# Altium PCB controller.PcbDoc
Units mm, origin at the board's own origin, x right, y up, seen from the top; angles counter-clockwise.
Board outline 152.4 x 101.6 mm, 2 copper layers (Top Layer, Bottom Layer); 67 components, 110 nets, 264 pads, 12 vias.
Unrouted connection lines stored in the file: 118.
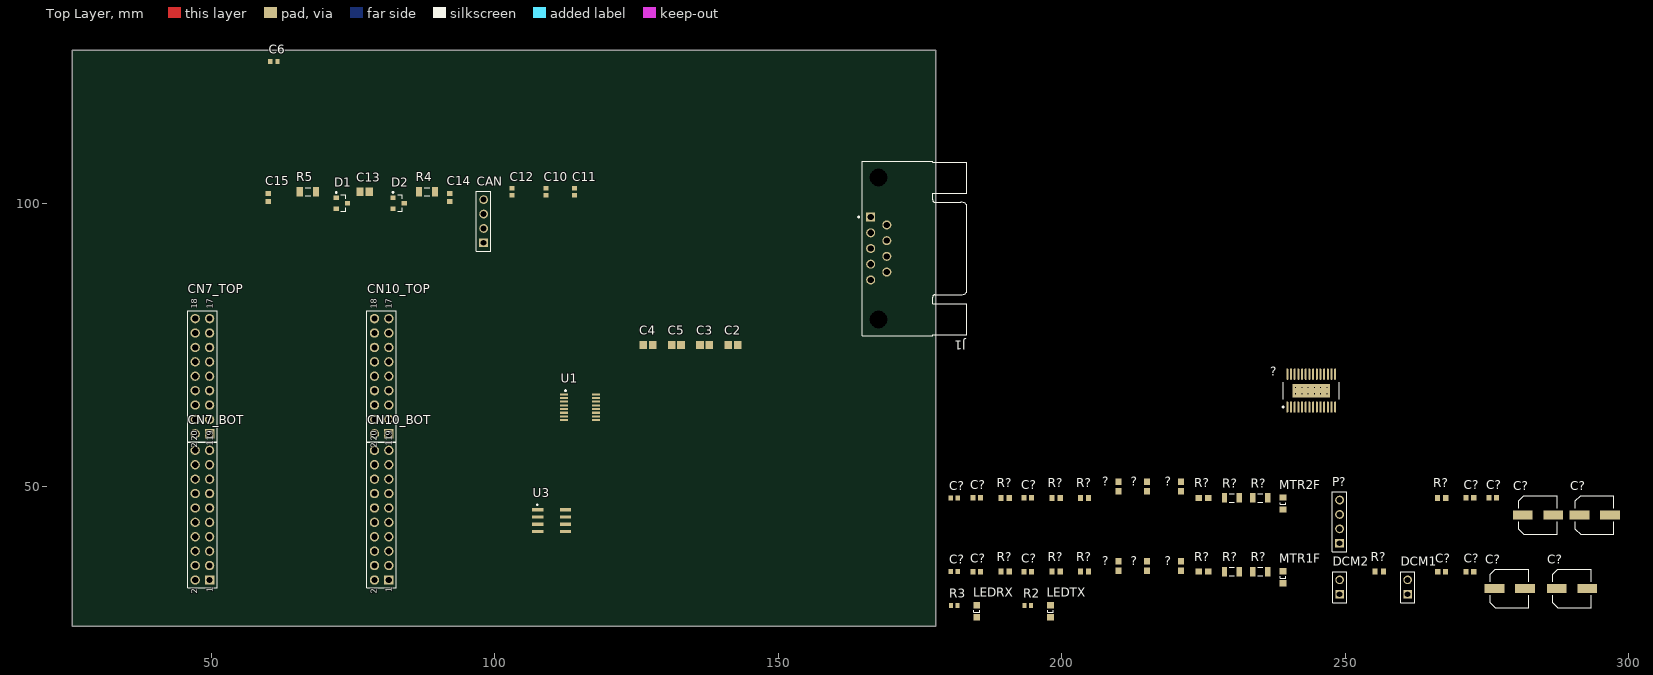
[diagram p0: Top Layer view]
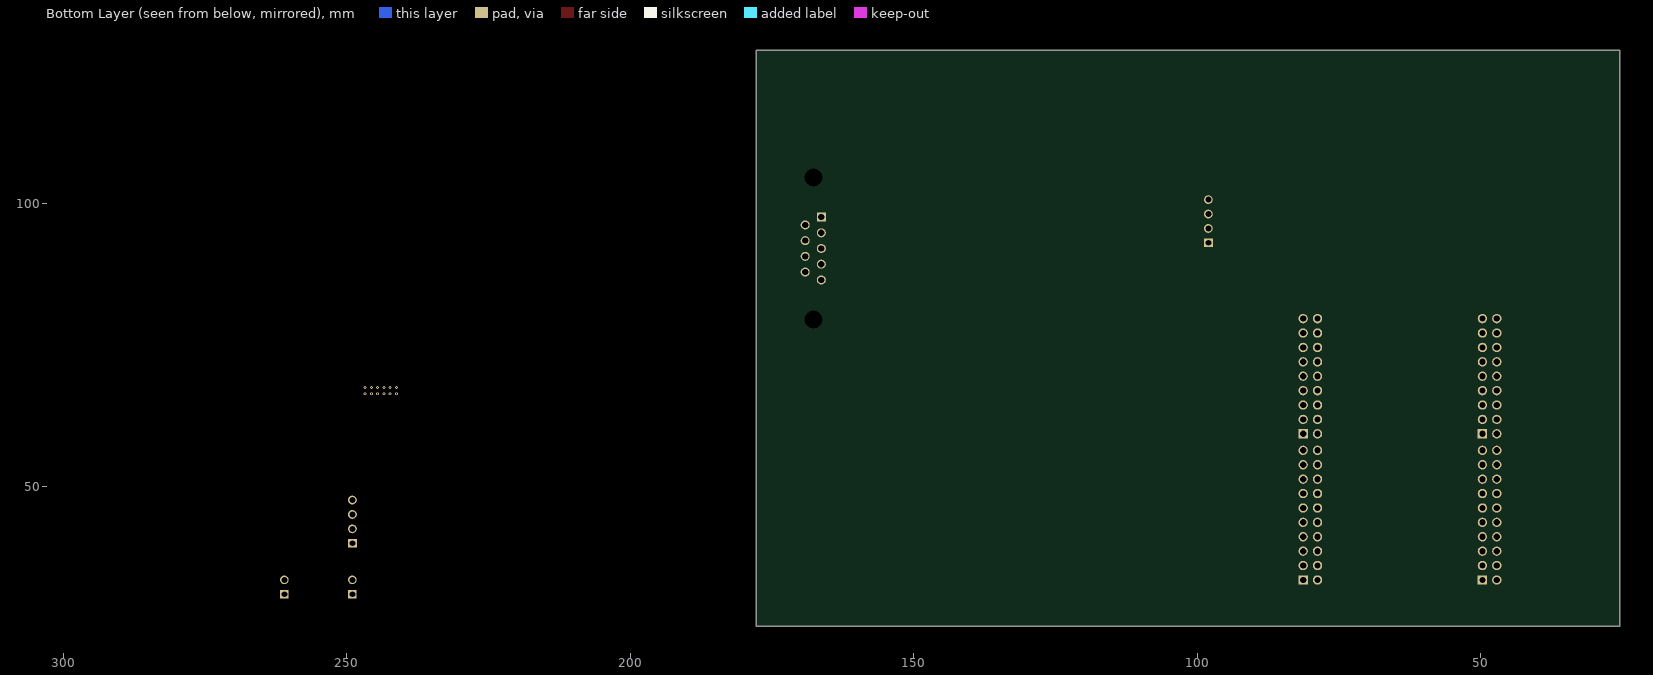
[diagram p1: Bottom Layer view, seen from below]

## Layer stack, top to bottom
Top Solder: solder mask 0.0102, Solder Resist, Dk 3.5
Top Layer: signal copper 0.0356
Dielectric 1: dielectric 0.32, FR-4, Dk 4.8
Bottom Layer: signal copper 0.0356
Bottom Solder: solder mask 0.0102, Solder Resist, Dk 3.5

## Board outline
25.4,25.4 177.8,25.4 177.8,127 25.4,127

## Design rules (kind name [scope] priority, off if disabled: settings)
Clearance [All] p1: gap=0.254 ignorepadtopadclearanceinfootprint=FALSE except(0: Arc-Hole Track-Hole SMDPad-Hole THPad-Hole Via-Hole Fill-Hole Poly-Hole Region-Hole Text-Hole)
PolygonConnect [All] p1: connectstyle=Relief reliefconductorwidth=0.254 reliefentries=4 polygonreliefangle="90 Angle" airgapwidth=0.254
RoutingVias [All] p1: holewidth=0.711 width=1.27 viastyle="Through Hole" minholewidth=0.711 minwidth=1.27 maxholewidth=0.711 maxwidth=1.27
SolderMaskExpansion [All] p1: expansion=0.102
Width [All] p1: maxlimit=0.254 minlimit=0.254 preferedwidth=0.254
30 further rules are at their usual default settings.

## Classes and differential pairs
component class "Stepper Motor Driver": ? C? MTR2F P? R?
component class "DC Motor Driver": ? C? DCM1 DCM2 MTR1F R?
component class CANbus: C10 C11 C12 C13 C14 C15 CAN D1 D2 R4 R5 U3
component class rs232: C2 C3 C4 C5 C6 J1 LEDRX LEDTX R2 R3 U1
component class microcontroller: CN7_BOT CN7_TOP CN10_BOT CN10_TOP

## Components (designator, comment, footprint, x,y, rotation, side; value= is the part's Value field where it differs from the comment)
? "0R" RESC1609X55X30ML10T20 210,36 r90 top
? "0R" RESC1609X55X30ML10T20 215,36 r90 top
? "0R" RESC1609X55X30ML10T20 221,36 r90 top
? "DRV8843" TI-PWP28-5720X1950TP_M 244,66.929 r90 top
? "0R" RESC1609X55X30ML10T20 221,50 r90 top
? "0R" RESC1609X55X30ML10T20 210,50 r90 top
? "0R" RESC1609X55X30ML10T20 215,50 r90 top
C2 "100nF" CAPC2013X94X50NL20T25 142,75 r0 top
C3 "100nF" CAPC2013X94X50NL20T25 137,75 r0 top
C4 "100nF" CAPC2013X94X50NL20T25 127,75 r0 top
C5 "100nF" CAPC2013X94X50NL20T25 132,75 r0 top
C6 "100nF" CAPC1608X92X38LL15T08 61,125 r0 top
C10 "100nF" CAPC1608X92X38LL15T08 109,102 r90 top
C11 "100nF" CAPC1608X92X38LL15T08 114,102 r90 top
C12 "100nF" CAPC1608X92X38LL15T08 103,102 r90 top
C13 "47nF" CAPC2013X88X50NL20T25 77,102 r0 top
C14 "47pF" CAPC1608X87X35NL15T15 92,101 r90 top
C15 "47pF" CAPC1608X87X35NL15T15 60,101 r90 top
C? "100u" NIC-CAPA2-6.3X5.8_V 279,32 r0 top
C? "100u" NIC-CAPA2-6.3X5.8_V 290,32 r0 top
C? "100n" CAPC1608X87X35NL15T15 194,35 r0 top
C? "470n" CAPC1608X90X35NL10T15 185,35 r0 top
C? "100n" CAPC1608X87X35NL15T15 267,35 r0 top
C? "10n" CAPC1608X87X35LL15T15 181,35 r0 top
C? "100n" CAPC1608X87X35NL15T15 272,35 r0 top
C? "100n" CAPC1608X87X35NL15T15 272,48 r0 top
C? "470n" CAPC1608X90X35NL10T15 185,48 r0 top
C? "10n" CAPC1608X87X35LL15T15 181,48 r0 top
C? "100n" CAPC1608X87X35NL15T15 194,48 r0 top
C? "100u" NIC-CAPA2-6.3X5.8_V 284,45 r0 top
C? "100n" CAPC1608X87X35NL15T15 276,48 r0 top
C? "100u" NIC-CAPA2-6.3X5.8_V 294,45 r0 top
CAN "TSW-104-08-T-S" SMTC-TSW-104-08-X-S 98,93 r90 top
CN7_BOT "61302021121" 61302021121 48.387,44.958 r90 top
CN7_TOP "61301821121" 61301821121 48.387,69.469 r90 top
CN10_BOT "61302021121" 61302021121 80.01,44.958 r90 top
CN10_TOP "61301821121" 61301821121 80.01,69.469 r90 top
D1 "SM12T1G" ONSC-SOT-23-3-318-08_V 73,100 r0 top
D2 "SM12T1G" ONSC-SOT-23-3-318-08_V 83,100 r0 top
DCM1 "MTLW-102-05-T-S-172" SMTC-MTLW-102-05-X-S-172 261,31 r90 top
DCM2 "MTLW-102-05-T-S-172" SMTC-MTLW-102-05-X-S-172 249,31 r90 top
J1 "1734354-1" TE-1734354-1-9_V 174,92 r270 top
LEDRX "RED" 0805_A 185,28 r90 top
LEDTX "GREEN" 0805_A 198,28 r90 top
MTR1F "RED" 0805_A 239,34 r90 top
MTR2F "RED" 0805_A 239,47 r90 top
P? "TSW-104-08-L-S" SMTC-TSW-104-08-X-S 249,40 r90 top
R2 "1.2K" RESC1609X50X30LL10T20 194,29 r0 top
R3 "680R" RESC1609X50X30LL10T20 181,29 r0 top
R4 "60R" RESC3216X70X50NL05T20 88,102 r0 top
R5 "60R" RESC3216X70X50NL05T20 67,102 r0 top
R? "10K" RESC1608X55X30ML15T15 199,35 r0 top
R? "10K" RESC1608X55X30ML15T15 190,35 r0 top
R? "0R22 1W" RESC3116X70X45LL15T20 230,35 r0 top
R? "0R22 1W" RESC3116X70X45LL15T20 235,35 r0 top
R? "0R" RESC1609X55X30ML10T20 225,35 r0 top
R? "1K" RESC1608X55X30ML15T15 256,35 r0 top
R? "10K" RESC1608X55X30ML15T15 204,35 r0 top
R? "10K" RESC1608X55X30ML15T15 190,48 r0 top
R? "0R22 1W" RESC3116X70X45LL15T20 230,48 r0 top
R? "0R" RESC1609X55X30ML10T20 225,48 r0 top
R? "1K" RESC1608X55X30ML15T15 267,48 r0 top
R? "10K" RESC1608X55X30ML15T15 204,48 r0 top
R? "0R22 1W" RESC3116X70X45LL15T20 235,48 r0 top
R? "10K" RESC1608X55X30ML15T15 199,48 r0 top
U1 "ICL3232ECV-16Z" TSSOP16_4P40X5 115,64 r0 top
U3 "MCP2542WFD-H/SN" SOIC8_4P9X3P9MC 110,44 r0 top

## Footprints (in the part's own frame and the unit in brackets; to place one, negate y for a bottom-side part, rotate by r counter-clockwise, add the part's x,y. Pads: shape width x height; smd on the part's side, far side on the other; paste and mask are expansions set on the pad)
0805_A [mm] "Chip LED, 2-Leads, Body 2.0x1.3mm, IPC Medium Density"
  rect 1.1x1.2 smd: 1(-1.05,0) 2(1.05,0)
  silkscreen extent -0.15,-0.5 0.15,0.5, body extent -1,-0.62 1,0.63, height 0.68
61301821121 [mm] "Pin Header, pitch 2.54 mm, THT, Vertical, dual row, 18p"
  rect 1.65x1.65 hole 1.1: 1(-10.16,-1.27)
  round 1.65 hole 1.1: 2(-10.16,1.27) 3(-7.62,-1.27) 4(-7.62,1.27) 5(-5.08,-1.27) 6(-5.08,1.27) 7(-2.54,-1.27) 8(-2.54,1.27) 9(0,-1.27) 10(0,1.27) 11(2.54,-1.27) 12(2.54,1.27) 13(5.08,-1.27) 14(5.08,1.27) 15(7.62,-1.27) 16(7.62,1.27) 17(10.16,-1.27) 18(10.16,1.27)
  silkscreen extent -11.58,-2.62 11.58,2.62, body extent -11.43,-2.54 11.43,2.54, height 8.59
61302021121 [mm] "Pin Header, pitch 2.54 mm, THT, Vertical, dual row, 20p"
  rect 1.65x1.65 hole 1.1: 1(-11.43,-1.27)
  round 1.65 hole 1.1: 2(-11.43,1.27) 3(-8.89,-1.27) 4(-8.89,1.27) 5(-6.35,-1.27) 6(-6.35,1.27) 7(-3.81,-1.27) 8(-3.81,1.27) 9(-1.27,-1.27) 10(-1.27,1.27) 11(1.27,-1.27) 12(1.27,1.27) 13(3.81,-1.27) 14(3.81,1.27) 15(6.35,-1.27) 16(6.35,1.27) 17(8.89,-1.27) 18(8.89,1.27) 19(11.43,-1.27) 20(11.43,1.27)
  silkscreen extent -12.85,-2.62 12.85,2.62, body extent -12.7,-2.54 12.7,2.54, height 8.59
CAPC1608X87X35LL15T15 [mm] "Chip Capacitor, 2-Leads, Body 1.60x0.80mm, IPC High Density"
  rect 0.8x0.9 smd: 1(-0.625,0) 2(0.625,0)
  body extent -0.87,-0.48 0.87,0.48, height 0.87
CAPC1608X87X35NL15T15 [mm] "Chip Capacitor, 2-Leads, Body 1.60x0.80mm, IPC Medium Density"
  rect 0.9x1 smd: 1(-0.675,0) 2(0.675,0)
  body extent -0.87,-0.48 0.87,0.47, height 0.87
CAPC1608X90X35NL10T15 [mm] "Chip Capacitor, 2-Leads, Body 1.60x0.80mm, IPC Medium Density"
  rect 0.85x0.95 smd: 1(-0.675,0) 2(0.675,0)
  body extent -0.85,-0.45 0.85,0.45, height 0.9
CAPC1608X92X38LL15T08 [mm] "Chip Capacitor, 2-Leads, Body 1.60x0.80mm, IPC High Density"
  rect 0.75x0.9 smd: 1(-0.625,0) 2(0.625,0)
  body extent -0.87,-0.48 0.87,0.48, height 0.92
CAPC2013X88X50NL20T25 [mm] "Chip Capacitor, 2-Leads, Body 2.00x1.25mm, IPC Medium Density"
  rect 1.3x1.45 smd: 1(-0.8,0) 2(0.8,0)
  body extent -1.1,-0.72 1.1,0.72, height 0.88
CAPC2013X94X50NL20T25 [mm] "Chip Capacitor, 2-Leads, Body 2.01x1.25mm, IPC Medium Density"
  rect 1.35x1.45 smd: 1(-0.825,0) 2(0.825,0)
  body extent -1.1,-0.72 1.11,0.72, height 0.94
NIC-CAPA2-6.3X5.8_V [mm] "Aluminum Electrolytic Capacitor, Diameter 6.3mm, Height 6.1mm, Pitch 5.4mm"
  rect 3.5x1.6 smd: 1(-2.7,0) 2(2.7,0)
  silkscreen extent -3.4,-3.4 3.4,3.4, body extent -3.14,-3.12 3.14,3.15, height 6.1
ONSC-SOT-23-3-318-08_V [mm] "SOT23, 3-Leads, Body 2.92x1.3mm, Pitch 0.95mm"
  rect 0.9x0.8 smd: 1(-1,0.95) 2(-1,-0.95) 3(1,0)
  silkscreen extent -1.12,-1.46 0.65,2.02, body extent -0.65,-1.46 0.65,1.46, height 1.11
RESC1608X55X30ML15T15 [mm] "Chip Resistor, 2-Leads, Body 1.60x0.80mm, IPC Low Density"
  rect 0.9x1.05 smd: 1(-0.725,0) 2(0.725,0)
  body extent -0.87,-0.48 0.87,0.48, height 0.55
RESC1609X50X30LL10T20 [mm] "Chip Resistor, 2-Leads, Body 1.55x0.85mm, IPC High Density"
  rect 0.7x0.85 smd: 1(-0.575,0) 2(0.575,0)
  body extent -0.82,-0.48 0.82,0.48, height 0.5
RESC1609X55X30ML10T20 [mm] "Chip Resistor, 2-Leads, Body 1.60x0.85mm, IPC Low Density"
  rect 1.15x1.05 smd: 1(-0.825,0) 2(0.825,0)
  body extent -0.85,-0.48 0.85,0.48, height 0.55
RESC3116X70X45LL15T20 [mm] "Chip Resistor, 2-Leads, Body 3.10x1.60mm, IPC High Density"
  rect 0.95x1.65 smd: 1(-1.3,0) 2(1.3,0)
  silkscreen extent -0.45,-0.72 0.45,0.72, body extent -1.63,-0.87 1.63,0.87, height 0.7
RESC3216X70X50NL05T20 [mm] "Chip Resistor, 2-Leads, Body 3.20x1.60mm, IPC Medium Density"
  rect 1.1x1.65 smd: 1(-1.425,0) 2(1.425,0)
  silkscreen extent -0.5,-0.72 0.5,0.72, body extent -1.63,-0.82 1.62,0.82, height 0.7
SMTC-MTLW-102-05-X-S-172 [mm] "Terminal Assembly, 1x2 Pins, Vertical, 2.54mm Pitch, Male"
  rect 1.52x1.52 hole 1.02: 1(0,0)
  round 1.52 hole 1.02: 2(2.54,0)
  silkscreen extent -1.46,-1.24 4,1.24, body extent -1.27,-1.24 3.81,1.24, height 6.02
SMTC-TSW-104-08-X-S [mm] ".025 SQ Post Terminal Strip Assembly, 1x4 Pins, Vertical, 2.54mm Pitch, Male"
  rect 1.55x1.55 hole 1.02: 1(0,0)
  round 1.55 hole 1.02: 2(2.54,0) 3(5.08,0) 4(7.62,0)
  silkscreen extent -1.46,-1.27 9.08,1.27, body extent -1.27,-1.27 8.89,1.27, height 8.38
SOIC8_4P9X3P9MC [mil]
  rect 78x22 smd: 1(-97,75) 2(-97,25) 3(-97,-25) 4(-97,-75) 5(97,-75) 6(97,-25) 7(97,25) 8(97,75)
  silkscreen extent -105,105 -95,115, body extent -122,-96 122,96, height 69
TE-1734354-1-9_V [mm] "TH, 9-Leads, Body 30.8x18.4mm, Pitch 2.77mm"
  rect 1.6x1.6 hole 1.09: 1(-5.54,-7.72)
  round 1.6 hole 1.09: 2(-2.77,-7.72) 3(0,-7.72) 4(2.77,-7.72) 5(5.54,-7.72) 6(-4.155,-4.88) 7(-1.385,-4.88) 8(1.385,-4.88) 9(4.155,-4.88)
  round 0 hole 3.18 unplated: MH1(-12.52,-6.3) MH2(12.52,-6.3)
  silkscreen extent -15.4,-9.97 15.4,9.2, body extent -15.4,-9.2 15.4,9.22, height 12.5
TI-PWP28-5720X1950TP_M [mm] "SOP, 28-Leads, Body 9.7x4.4mm, Pitch 0.65mm, Thermal Pad 5.72 x 1.95mm, IPC Low Density"
  oval 2x0.35 smd: 1(-2.9,4.225) 2(-2.9,3.575) 3(-2.9,2.925) 4(-2.9,2.275) 5(-2.9,1.625) 6(-2.9,0.975) 7(-2.9,0.325) 8(-2.9,-0.325) 9(-2.9,-0.975) 10(-2.9,-1.625) 11(-2.9,-2.275) 12(-2.9,-2.925) 13(-2.9,-3.575) 14(-2.9,-4.225) 15(2.9,-4.225) 16(2.9,-3.575) 17(2.9,-2.925) 18(2.9,-2.275) 19(2.9,-1.625) 20(2.9,-0.975) 21(2.9,-0.325) 22(2.9,0.325) 23(2.9,0.975) 24(2.9,1.625) 25(2.9,2.275) 26(2.9,2.925) 27(2.9,3.575) 28(2.9,4.225)
  rect 2.4x6.69 smd: 29(0,0)
  silkscreen extent -3.02,-4.9 1.5,5.07, body extent -2.25,-4.9 2.25,4.9, height 1.2
TSSOP16_4P40X5 [mil]
  rect 58x14 smd: 1(-111,89.57) 2(-111,63.98) 3(-111,38.39) 4(-111,12.8) 5(-111,-12.8) 6(-111,-38.39) 7(-111,-63.98) 8(-111,-89.57) 9(111,-89.57) 10(111,-63.98) 11(111,-38.39) 12(111,-12.8) 13(111,12.8) 14(111,38.39) 15(111,63.98) 16(111,89.57)
  silkscreen extent -105,110 -95,120, body extent -126,-101 126,101, height 47

## Part data
? ? ? ? ? ? R? R?: library part CMP-2000-03816-1, Manufacturer="Vishay Dale", Part Number=CRCW06030000Z0EA
?: Package=HTSSOP28PWP, DeviceSetName=DRV8843, GateName_1=G$1, LibraryName=DRV88xx, SymbolName_1=DRV8843
C2 C3 C4 C5: library part CMP-2007-04370-1, Manufacturer="AVX Interconnect / Elco", Part Number=08055C104K4T2A
C6 C10 C11 C12: library part CMP-2006-01974-1, Manufacturer=Vitramon, Part Number=VJ0603Y104KNXAO
C13: library part CMP-2007-00392-1, Manufacturer=Kemet, Part Number=C0805C473K3RACTU
C14 C15: library part CMP-2006-03321-1, Manufacturer=Kemet, Part Number=C0603C470J1GACTU
C? C? C? C?: library part CMP-0687-00050-1, "Aluminum Electrolytic Capacitor, UD Series, Low Impedance, 100 uF, 16 V, + / - 20%, -55 to 105 degC, Chip Type, 6.3 x 5.8 mm D x L, Pb-Free, Reel", Manufacturer=Nichicon, PartNumber=UUD1C101MCL1GS, Rated Capacitance="100 uF", Rated Ripple Current (at 100kHz)="230 mA", Rated Voltage="16 V", Tolerance Rated Capacitance="-20 to 20%", ComponentLink1Description="Manufacturer URL", ComponentLink1URL=http://www.nichicon.co.jp/, ComponentLink2Description=Datasheet, ComponentLink2URL=http://products.nichicon.co.jp/en/pdf/XJA043/e-ud.pdf, ComponentLink3Description="Package Specification", ComponentLink3URL=http://products.nichicon.co.jp/en/pdf/XJA043/e-ud.pdf, DatasheetVersion=08/2012, Diameter="6.3 mm", Endurance Time="2000 h", Impedance="0.44 Ohm", Length="5.8 mm", Mounting Technology="Surface Mount", PackageDescription="2-Pin Surface Mount Device, Diameter 6.3 mm, Height 5.8 mm, Pitch 5.4 mm", PackageReference=CAPAE-D6.3H5.8, Packing="Dia382mm Reel", RoHS=TRUE
C? C? C? C? C? C?: library part CMP-2006-03300-1, Manufacturer=Kemet, Part Number=C0603X104K5RACTU
C? C?: library part CMP-2006-02860-1, Manufacturer=Murata, Part Number=GRM188R71C474KA88D
C? C?: library part CMP-2006-03036-1, Manufacturer=Kemet, Part Number=C0603C103K1RACTU
CAN: library part CMP-1024-00356-1, "0.025\" SQ Post Header, Through-hole, Vertical, -55 to 105 degC, 2.54 mm Pitch, 4-Pin, Male, RoHS", Manufacturer=Samtec, Temperature Range="-55 to 105 degC", ComponentLink1Description="Manufacturer URL", ComponentLink1URL=http://www.samtec.com, ComponentLink2Description=Datasheet, ComponentLink2URL=http://www.samtec.com/documents/webfiles/pdf/TSW_TH.PDF, ComponentLink3Description="Package Specification", ComponentLink3URL=http://www.samtec.com/documents/webfiles/cpdf/TSW-XXX-XX-XXX-X-XX-XXX-MKT.pdf, DatasheetVersion=F-214, Mounting Technology=Through-hole, Orientation=Vertical, PackageDescription=".025[0.64] SQ. Post Terminal Strip Assembly", PackageReference=TSW-104-08-X-S, PackageVersion="DM, 8/1988", PartNumber=TSW-104-08-T-S, Pitch="2.54 mm", RoHS=True
CN7_BOT CN10_BOT: "THT Vertical Pin Header WR-PHD, Pitch 2.54 mm, Dual Row, 20 pins", Contact Resistance="20 mOhm", Operating Temperature="-40 to 105 degC", Rated Current="3 A", Withstanding Voltage="500 VAC", Working Voltage="250 VAC", ComponentLink1Description=Manufacturer, ComponentLink1URL=http://www.we-online.de, ComponentLink2Description=Datasheet, ComponentLink2URL=https://katalog.we-online.de/em/datasheet/6130xx21121.pdf, Gender=Male, Mounting Technology=THT, Orientation=Vertical, Packaging=Bag, Part Number=61302021121, Pin Number=20, Pitch="2.54 mm", Published Date="August 2018", Publisher="Wurth Elektronik", Row Number=Dual
CN7_TOP CN10_TOP: "THT Vertical Pin Header WR-PHD, Pitch 2.54 mm, Dual Row, 18 pins", Contact Resistance="20 mOhm", Operating Temperature="-40 to 105 degC", Rated Current="3 A", Withstanding Voltage="500 VAC", Working Voltage="250 VAC", ComponentLink1Description=Manufacturer, ComponentLink1URL=http://www.we-online.de, ComponentLink2Description=Datasheet, ComponentLink2URL=https://katalog.we-online.de/em/datasheet/6130xx21121.pdf, Gender=Male, Mounting Technology=THT, Orientation=Vertical, Packaging=Bag, Part Number=61301821121, Pin Number=18, Pitch="2.54 mm", Published Date="August 2018", Publisher="Wurth Elektronik", Row Number=Dual
D1 D2: library part CMP-1061-00667-1, "Transient Voltage Suppressor Diode Array, Dual Common Anode Diodes for ESD Protection, 3-Pin SOT-23, Pb-Free, Tape and Reel", Manufacturer="On Semiconductor", ComponentLink1Description="Manufacturer URL", ComponentLink1URL=http://www.onsemi.com/, ComponentLink2Description=Datasheet, ComponentLink2URL=http://www.onsemi.com/pub_link/Collateral/SM12T1-D.PDF, ComponentLink3Description="Package Specification", ComponentLink3URL=http://www.onsemi.cn/pub_link/Collateral/318-08.PDF, DatasheetVersion="Rev. 6", Direction=Unidirectional, IR Max (uA)=1, Mounting Technology="Surface Mount", PackageDescription="3-Pin Small Outline Transistor, Body 2.92 x 1.3 mm, Pitch 0.95 mm", PackageReference=SOT-23-3-318-08, PackageVersion="Rev. AP, 11/2009", Packing="Tape and Reel", PartNumber=SM12T1G, PPK Max (W)=300, RoHS=Pb-Free
DCM1 DCM2: "Low Profile .025\" SQ Post Header, Through-hole, Vertical, -55 to 105 degC, 2.54 mm Pitch, 2-Pin, Male, RoHS", Manufacturer=Samtec, Temperature Range="-55 to 105 degC", ComponentLink1Description="Manufacturer URL", ComponentLink1URL=http://www.samtec.com, ComponentLink2Description=Datasheet, ComponentLink2URL=http://www.samtec.com/documents/webfiles/pdf/MTLW_TH.PDF, ComponentLink3Description="Package Specification", ComponentLink3URL=http://www.samtec.com/documents/webfiles/cpdf/MTLW-1XX-XX-XX-X-XXX-XX-XX-MKT1.pdf, DatasheetVersion=F-214, Mounting Technology=Through-hole, Orientation=Vertical, PackageDescription="Low Profile Terminal Assembly", PackageReference=MTLW-102-05-X-S-172, PackageVersion="T, 6/1991", PartNumber=MTLW-102-05-T-S-172, Pitch="2.54 mm", RoHS=True
J1: library part CMP-2000-05403-1, "D-Subminiature Socket, Pitch 1.385 mm, 9 Position, Height 12.5 mm, Tail Length 3.2 mm, RoHS, Tray", Color=Black, Current Rating=2A, Manufacturer="TE Connectivity", Operating Temperature=-55degC~105degC, Standard Package=90, Voltage Rating=250V, 3D Model=1734354-1.pdf, Catalog Drawings=AMPD-SubMale.318, Category=Connectors,Interconnects, Connector Style=D-Sub, Connector Type=Receptacle,FemaleSockets, Contact Finish=Gold, Contact Finish Thickness=Flash, Contact Type=Signal, Datasheet URL=http://www.te.com.cn/chn-zh/search.html?q=1734354-1&source=header#pdp-optional-registration, Datasheet Version="Rev. A1, 03/2011", Dynamic Catalog=AMPLIMITEHD-20Series, Family=D-SubConnectors, Featured Product=AMPLIMITED-SubminiatureConnectors, Features=BoardLock, Flange Feature=MatingSide;FemaleScrewlock(4-40), Housing Material=Polyamide(PA9T),Nylon9T,GlassFilled, Manufacturer URL=http://www.te.com/, Mating Products="AML09B-ND / -CONND-SUBPLUG9POSGOLD", Mounting Type=ThroughHole,RightAngle, Number of Positions=9, Number of Rows=2, Other Names=A35107, Product Training Modules=AMPLIMITED-SubConnectors, RoHS Information=1734354-1StatementofCompliance, Series=AMPLIMITEHD-20, Shell Material, Finish=Steel,NickelPlated, Shell Size, Connector Layout=1(DE,E), Termination=Solder
LEDRX LEDTX MTR1F MTR2F: library part CMP-1426-00011-1, "SMD mono-color Chip LED, WL-SMCW, Red", Color=Red, Manufacturer="Wuerth Elektronik", PartNumber=150080RS75000, ComponentLink1Description="Manufacturer URL", ComponentLink1URL=http://www.we-online.com, ComponentLink2Description=Datasheet, ComponentLink2URL=http://katalog.we-online.com/led/datasheet/150080RS75000.pdf, PackageReference=0805_A
P?: library part CMP-1024-00358-1, "0.025\" SQ Post Header, Through-hole, Vertical, -55 to 125 degC, 2.54 mm Pitch, 4-Pin, Male, RoHS", Manufacturer=Samtec, Temperature Range="-55 to 125 degC", ComponentLink1Description="Manufacturer URL", ComponentLink1URL=http://www.samtec.com, ComponentLink2Description=Datasheet, ComponentLink2URL=http://www.samtec.com/documents/webfiles/pdf/TSW_TH.PDF, ComponentLink3Description="Package Specification", ComponentLink3URL=http://www.samtec.com/documents/webfiles/cpdf/TSW-XXX-XX-XXX-X-XX-XXX-MKT.pdf, DatasheetVersion=F-214, Mounting Technology=Through-hole, Orientation=Vertical, PackageDescription=".025[0.64] SQ. Post Terminal Strip Assembly", PackageReference=TSW-104-08-X-S, PackageVersion="DM, 8/1988", PartNumber=TSW-104-08-L-S, Pitch="2.54 mm", RoHS=True
R2 R3: library part CMP-2000-03413-1, Manufacturer="Vishay Dale", Part Number=CRCW06034K70JNEA
R4 R5: library part CMP-2003-00795-1, Manufacturer=Panasonic, Part Number=ERJ8CWFR024V
R? R? R? R? R? R? R? R?: library part CMP-2000-00704-1, Manufacturer=Panasonic, Part Number=ERJ-3GEYJ103V
R? R? R? R?: library part CMP-2003-04859-1, Manufacturer="Vishay Dale", Part Number=RCWE1206R220FKEA
U1: MANUFACTURER_PART_NUMBER=ICL3232ECV16Z, Package=TSSOP16_4P40X5, DeviceSetName=ICL3232ECV-16Z, GateName_1=A, LibraryName=ICL3232, SymbolName_1=ICL3232ECV-16Z-ND, VENDOR=Intersil
U3: MANUFACTURER_PART_NUMBER=MCP2542WFDHSN, Package=SOIC8_4P9X3P9MC, DeviceSetName=MCP2542WFD-H/SN, GateName_1=A, LibraryName=MicrochipMCPCAN, SymbolName_1=MCP2542WFD-H/SN, VENDOR=Microchip

## Via types
v1: diameter 0.5, hole 0.2, Top Layer to Bottom Layer, 12 vias

## Nets (pads, with @x,y where several pads share a name; then routed paths per layer and width w, separated by ;. In a path a pad name is that pad's centre, name@x,y a point inside that pad or via, vN(x,y) a via of type N, cw(c..) or ccw(c..) an arc to the next point about the centre after c; other vN are vias at no path point)
3V3: ?.1@210,35.175 ?.1@210,49.175 ?.1@215,35.175 ?.1@215,49.175 ?.1@221,35.175 ?.1@221,49.175 C6.1 C10.2 R2.2 R3.2 R?.1@224.175,35 R?.1@224.175,48 R?.1@255.275,35 R?.1@266.275,48 U1.16 U3.3
12V: ?.4 ?.11 C?.1@276.3,32 C?.1@281.3,45 C?.1@287.3,32 C?.1@291.3,45 C?.2@267.675,35 C?.2@272.675,35 C?.2@272.675,48 C?.2@276.675,48
+5: C11.1 C12.2 CAN.2 U3.5
GND: C4.1 C5.1 C6.2 C10.1 C11.2 C12.1 C13.2 C14.1 C15.1 C?.1@184.325,35 C?.1@184.325,48 C?.1@193.325,35 C?.1@193.325,48 C?.1@266.325,35 C?.1@271.325,35 C?.1@271.325,48 C?.1@275.325,48 C?.2@281.7,32 C?.2@286.7,45 C?.2@292.7,32 C?.2@296.7,45 CAN.1 D1.2 D2.2 J1.5 R?.1@189.275,35 R?.1@189.275,48 R?.1@228.7,35 R?.1@228.7,48 R?.1@233.7,35 R?.1@233.7,48 U1.15 U3.2
Net?_1: ?.1@239.775,64.029 C?.2@181.625,48
Net?_2: ?.2@215,50.825 ?.26
Net?_3: ?.3 C?.2@194.675,48
Net?_5: ?.5 P?.4
Net?_6: ?.6 R?.2@236.3,48
Net?_7: ?.7 P?.3
Net?_8: ?.8 P?.1
Net?_9: ?.9 R?.2@231.3,48
Net?_10: ?.10 P?.2
Net?_12: ?.12 ?.13 R?.1@198.275,48 R?.2@190.725,48
Net?_15: ?.15 C?.2@185.675,48 R?.1@203.275,48 R?.2@199.725,48
Net?_16: ?.16
Net?_17: ?.17
Net?_18: ?.18 MTR2F.1 R?.2@204.725,48
Net?_20: ?.20
Net?_21: ?.21
Net?_22: ?.22
Net?_23: ?.23
Net?_24: ?.24 R?.2@225.825,48
NetC2_1: C2.1 U1.1
NetC2_2: C2.2 U1.3
NetC3_1: C3.1 U1.5
NetC3_2: C3.2 U1.4
NetC4_2: C4.2 U1.2
NetC5_2: C5.2 J1.8 U1.6 U1.7
NetC13_1: C13.1 R4.1 R5.2
NetC14_2: C14.2 CAN.4 D1.1 R4.2 U3.7
NetC15_2: C15.2 CAN.3 D2.1 R5.1 U3.6
NetCN7_BOT_1: CN7_BOT.1 CN7_BOT.2 CN7_BOT.4 CN7_TOP.8 CN10_BOT.2 CN10_TOP.9
NetCN7_BOT_3: CN7_BOT.3
NetCN7_BOT_5: CN7_BOT.5
NetCN7_BOT_6: CN7_BOT.6
NetCN7_BOT_7: CN7_BOT.7
NetCN7_BOT_8: CN7_BOT.8 CN7_TOP.9 CN7_TOP.10 CN7_TOP.11 CN10_BOT.18 CN10_BOT.20 CN10_TOP.10
NetCN7_BOT_9: CN7_BOT.9
NetCN7_BOT_10: CN7_BOT.10
NetCN7_BOT_11: CN7_BOT.11
NetCN7_BOT_12: CN7_BOT.12
NetCN7_BOT_13: CN7_BOT.13
NetCN7_BOT_14: CN7_BOT.14
NetCN7_BOT_15: CN7_BOT.15
NetCN7_BOT_16: CN7_BOT.16
NetCN7_BOT_17: CN7_BOT.17
NetCN7_BOT_18: CN7_BOT.18
NetCN7_BOT_19: CN7_BOT.19
NetCN7_BOT_20: CN7_BOT.20
NetCN7_TOP_1: CN7_TOP.1
NetCN7_TOP_2: CN7_TOP.2
NetCN7_TOP_3: CN7_TOP.3
NetCN7_TOP_4: CN7_TOP.4
NetCN7_TOP_5: CN7_TOP.5
NetCN7_TOP_6: CN7_TOP.6
NetCN7_TOP_7: CN7_TOP.7
NetCN7_TOP_12: CN7_TOP.12
NetCN7_TOP_13: CN7_TOP.13
NetCN7_TOP_14: CN7_TOP.14
NetCN7_TOP_15: CN7_TOP.15
NetCN7_TOP_16: CN7_TOP.16
NetCN7_TOP_17: CN7_TOP.17
NetCN7_TOP_18: CN7_TOP.18
NetCN10_BOT_1: CN10_BOT.1
NetCN10_BOT_3: CN10_BOT.3
NetCN10_BOT_4: CN10_BOT.4
NetCN10_BOT_5: CN10_BOT.5
NetCN10_BOT_6: CN10_BOT.6
NetCN10_BOT_7: CN10_BOT.7
NetCN10_BOT_8: CN10_BOT.8
NetCN10_BOT_9: CN10_BOT.9 LEDRX.1 U1.12
NetCN10_BOT_10: CN10_BOT.10
NetCN10_BOT_11: CN10_BOT.11
NetCN10_BOT_12: CN10_BOT.12
NetCN10_BOT_13: CN10_BOT.13 LEDTX.1 U1.11
NetCN10_BOT_14: CN10_BOT.14
NetCN10_BOT_15: CN10_BOT.15
NetCN10_BOT_16: CN10_BOT.16
NetCN10_BOT_17: CN10_BOT.17
NetCN10_BOT_19: CN10_BOT.19
NetCN10_TOP_1: CN10_TOP.1
NetCN10_TOP_2: CN10_TOP.2
NetCN10_TOP_3: CN10_TOP.3
NetCN10_TOP_4: CN10_TOP.4
NetCN10_TOP_5: CN10_TOP.5
NetCN10_TOP_6: CN10_TOP.6
NetCN10_TOP_7: CN10_TOP.7
NetCN10_TOP_8: CN10_TOP.8
NetCN10_TOP_11: CN10_TOP.11
NetCN10_TOP_12: CN10_TOP.12
NetCN10_TOP_13: CN10_TOP.13
NetCN10_TOP_14: CN10_TOP.14
NetCN10_TOP_15: CN10_TOP.15
NetCN10_TOP_16: CN10_TOP.16
NetCN10_TOP_17: CN10_TOP.17
NetCN10_TOP_18: CN10_TOP.18
NetJ1_2: J1.2 U1.13
NetJ1_3: J1.3 U1.14
NetJ1_4: J1.4 J1.6
NetJ1_7: J1.7 U1.8
NetLEDRX_2: LEDRX.2 R3.1
NetLEDTX_2: LEDTX.2 R2.1
NetMTR1F_2: MTR1F.2 R?.2@256.725,35
NetMTR2F_2: MTR2F.2 R?.2@267.725,48
NetU1_9: U1.9
NetU1_10: U1.10
NetU3_1: U3.1
NetU3_4: U3.4
NetU3_8: U3.8
pads on no net: ?.2@210,36.825 ?.2@210,50.825 ?.2@215,36.825 ?.2@221,36.825 ?.2@221,50.825 ?.2@240.425,64.029 ?.14 ?.19 ?.25 ?.27 ?.28 ?.29 C?.1@180.375,35 C?.1@180.375,48 C?.2@181.625,35 C?.2@185.675,35 C?.2@194.675,35 D1.3 D2.3 DCM1.1 DCM1.2 DCM2.1 DCM2.2 J1.1 J1.9 J1.MH1 J1.MH2 MTR1F.1 R?.1@198.275,35 R?.1@203.275,35 R?.2@190.725,35 R?.2@199.725,35 R?.2@204.725,35 R?.2@225.825,35 R?.2@231.3,35 R?.2@236.3,35
copper on no net:
  other v1: 241.25,66.379 242.35,66.379 243.45,66.379 244.55,66.379 245.65,66.379 246.75,66.379 241.25,67.479 242.35,67.479 243.45,67.479 244.55,67.479 245.65,67.479 246.75,67.479

## Text inside footprints (layer, text, board x,y; h text height)
CN7_BOT: Top Overlay "20" at 47.487,58.118 h1.02 r90; Top Overlay "19" at 50.187,58.118 h1.02 r90; Top Overlay "1" at 50.187,31.398 h1.02 r90; Top Overlay "2" at 47.487,31.098 h1.02 r90
CN7_TOP: Top Overlay "18" at 47.487,81.359 h1.02 r90; Top Overlay "17" at 50.187,81.359 h1.02 r90; Top Overlay "2" at 47.487,56.879 h1.02 r90; Top Overlay "1" at 50.187,57.179 h1.02 r90
CN10_BOT: Top Overlay "20" at 79.11,58.118 h1.02 r90; Top Overlay "19" at 81.81,58.118 h1.02 r90; Top Overlay "1" at 81.81,31.398 h1.02 r90; Top Overlay "2" at 79.11,31.098 h1.02 r90
CN10_TOP: Top Overlay "18" at 79.11,81.359 h1.02 r90; Top Overlay "17" at 81.81,81.359 h1.02 r90; Top Overlay "2" at 79.11,56.879 h1.02 r90; Top Overlay "1" at 81.81,57.179 h1.02 r90
U1: Mechanical 3 "*" at 112.562,65.219 h1.97; Mechanical 7 "*" at 111.342,66.515 h1.97
U3: Mechanical 3 "*" at 107.841,45.118 h1.97; Mechanical 7 "*" at 106.698,46.337 h1.97